# Altium PCB bmsSlavePCB_R.PcbDoc (part 2 of 3)
Units mm, origin at the board's own origin, x right, y up, seen from the top; angles counter-clockwise.
Board outline 161.93 x 135.51 mm, 2 copper layers (Top Layer, Bottom Layer); 207 components, 152 nets, 533 pads, 59 vias.
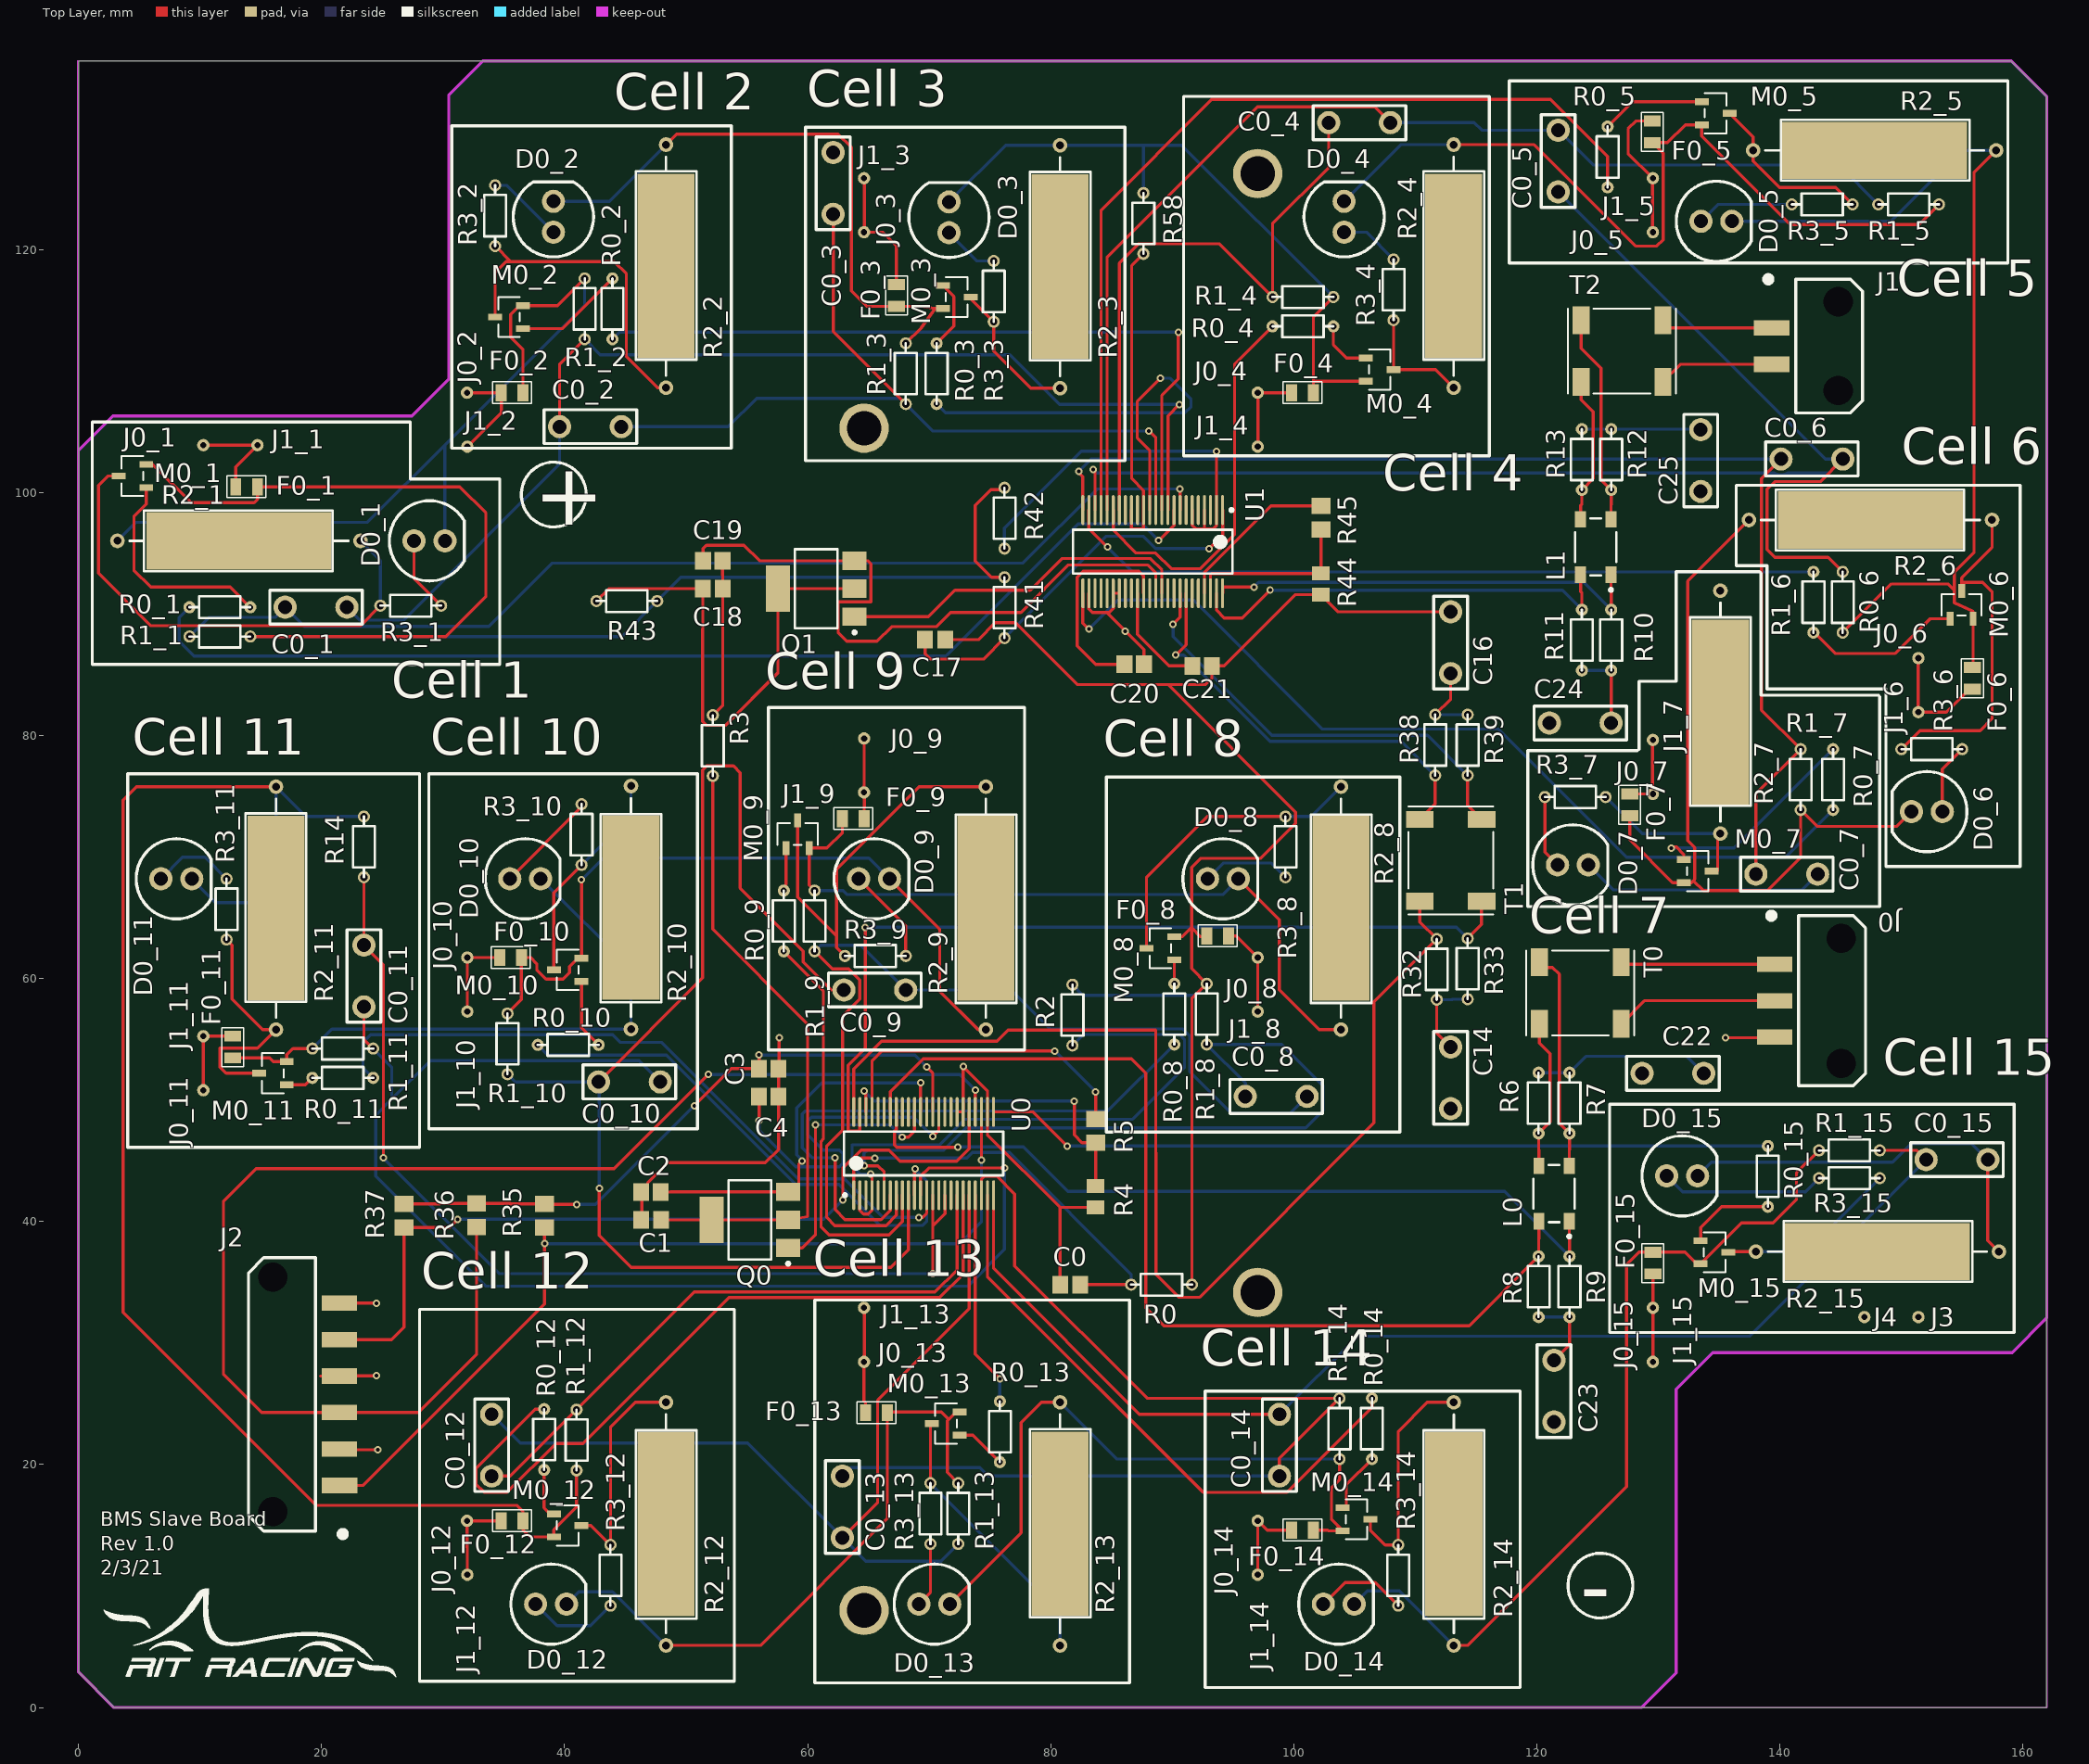
[diagram p0: Top Layer view]

## Via types
v1: diameter 0.61, hole 0.305, Top Layer to Bottom Layer, 59 vias

## Nets (pads, with @x,y where several pads share a name; then routed paths per layer and width w, separated by ;. In a path a pad name is that pad's centre, name@x,y a point inside that pad or via, vN(x,y) a via of type N, cw(c..) or ccw(c..) an arc to the next point about the centre after c; other vN are vias at no path point) (continued)
1-C8: C0_9.1 C0_10.2 R1_10.1 U0.10 | length 106.8
  Top Layer w0.254: C0_10.2@42.799,51.482 51.359,60.042 51.359,77.165 51.689,77.495 53.899,77.495 54.458,76.937 54.458,67.437 59.642,62.253 59.642,61.341 61.928,59.055 C0_9.1@62.986,59.055 ; v1(42.862,42.735) 42.862,38.849 45.491,36.22 66.859,36.22 68.295,37.657 U0.10@68.295,42.164
  Bottom Layer w0.254: R1_10.1@35.306,52.117 35.941,51.482 C0_10.2@42.799,51.482 42.862,51.418 v1(42.862,42.735)
1-C9: C0_8.1 C0_9.2 R1_9.1 U0.8 | length 82.1
  Top Layer w0.254: R1_9.1@60.573,62.23 62.021,60.782 63.373,60.782 64.287,59.868 64.287,58.288 62.881,56.881 62.881,47.526 61.564,46.209 61.564,40.335 62.233,39.666 66.448,39.666 67.295,40.513 U0.8@67.295,42.164
  Bottom Layer w0.254: R1_9.1@60.573,62.23 61.081,62.738 64.383,62.738 C0_9.2@68.066,59.055 76.708,59.055 79.913,55.85 90.852,55.85 91.457,55.245 91.457,52.307 94.869,48.895 99.695,48.895 C0_8.1@101.092,50.292
1-C10: C0_8.2 R1_8.1 U0.6 | length 62.6
  Top Layer w0.254: v1(64.643,44.577) 65.791,44.577 66.295,44.073 U0.6@66.295,42.164
  Bottom Layer w0.254: v1(64.643,44.577) 64.643,45.593 64.897,45.847 71.15,45.847 73.004,47.701 100.965,47.701 102.387,49.124 102.387,51.181 99.005,54.563 R1_8.1@92.837,54.563 96.012,51.388 C0_8.2@96.012,50.292
1-S1: R0_15.1 U0.25 | length 64.9
  Top Layer w0.254: U0.25@75.295,49.014 78.545,49.014 v1(81.356,46.203)
  Bottom Layer w0.254: v1(81.356,46.203) 138.993,46.203 R0_15.1@138.999,46.209
1-S2: R0_14.1 U0.23 | length 49.4
  Top Layer w0.254: U0.23@74.795,42.164 74.795,35.441 92.532,17.704 99.441,17.704 106.426,24.689 R0_14.1@106.426,25.447
1-S3: R0_13.1 U0.21 | length 17.8
  Top Layer w0.254: U0.21@73.795,42.164 73.795,29.075 v1(75.819,27.051)
  Bottom Layer w0.254: R0_13.1@75.819,25.193 v1(75.819,27.051)
1-S4: R0_12.1 U0.19 | length 63.2
  Top Layer w0.254: R0_12.1@38.321,24.558 37.588,24.558 32.715,19.685 32.715,18.39 33.401,17.704 35.281,17.704 39.294,21.717 41.529,21.717 53.543,33.731 70.865,33.731 72.795,35.662 U0.19@72.795,42.164
1-S7: R0_11.1 U0.13 | length 57.8
  Top Layer w0.254: v1(69.164,40.335) 69.469,40.335 69.795,40.661 U0.13@69.795,42.164
  Bottom Layer w0.254: R0_11.1@24.257,51.816 23.419,52.654 23.419,54.737 24.054,55.372 43.967,55.372 44.602,54.737 48.006,54.737 59.233,43.51 63.017,43.51 66.192,40.335 v1(69.164,40.335)